# Altium PCB DS153-1.0-C氢气传感器.PcbDoc
Units mil, origin at the board's own origin, x right, y up, seen from the top; angles counter-clockwise.
Board outline 688.98 x 688.98 mil, 2 copper layers (Top Layer, Bottom Layer); 11 components, 7 nets, 31 pads, 11 vias.
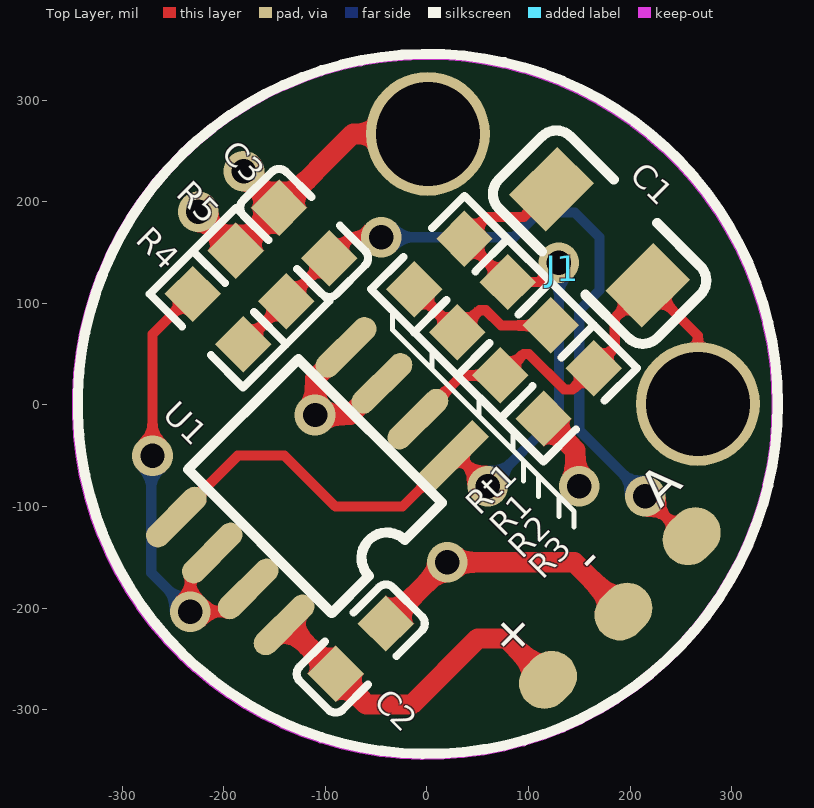
[diagram p0: Top Layer view]
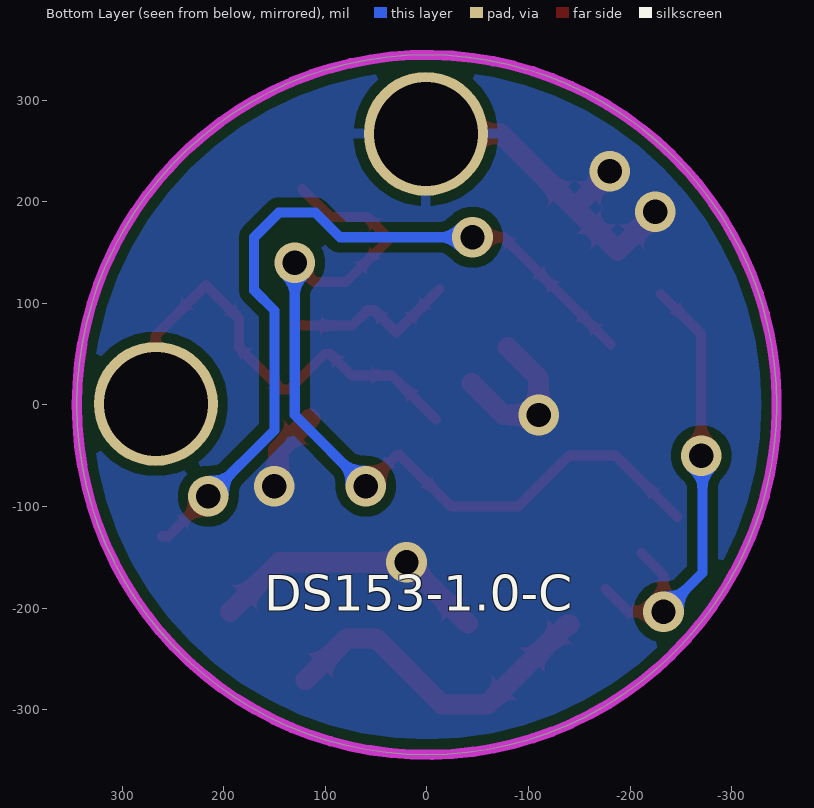
[diagram p1: Bottom Layer view, seen from below]
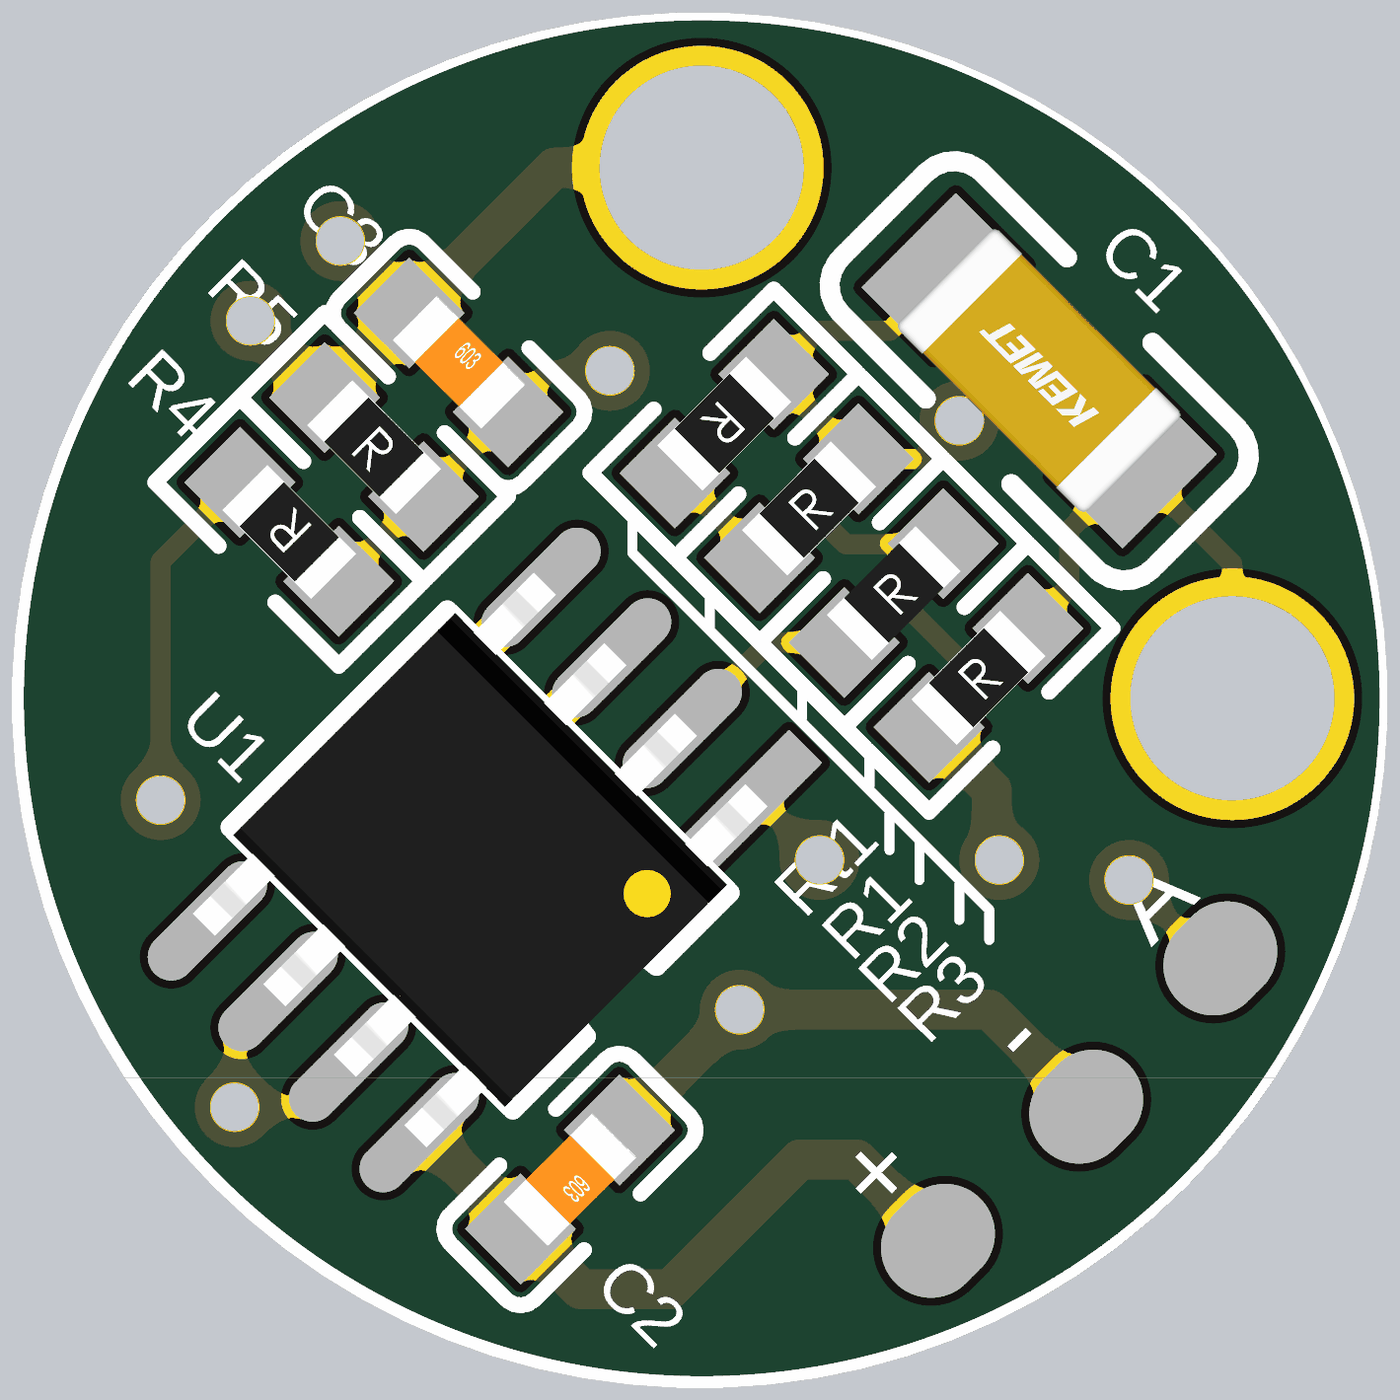
[diagram p2: 3D render of the assembled board from above, using the file's embedded part models]

## Layer stack, top to bottom
Top Solder: solder mask 0.4, Solder Resist, Dk 3.5
Top Layer: signal copper 1.4
Dielectric 1: dielectric 12.6, FR-4, Dk 4.8
Bottom Layer: signal copper 1.4
Bottom Solder: solder mask 0.4, Solder Resist, Dk 3.5

## Board outline
0,-344.49 cw(c0,0) -344.49,0 cw(c0,0) 0,344.49 cw(c0,0) 344.49,0 cw(c0,0)

## Design rules (kind name [scope] priority, off if disabled: settings)
Clearance [All] p1: gap=10 ignorepadtopadclearanceinfootprint=FALSE except(0: Arc-Hole Track-Hole SMDPad-Hole THPad-Hole Via-Hole Fill-Hole Poly-Hole Region-Hole Text-Hole)
PolygonConnect [All] p1: connectstyle=Relief reliefconductorwidth=10 reliefentries=4 polygonreliefangle="90 Angle" airgapwidth=10
RoutingVias [All] p1: holewidth=28 width=50 viastyle="Through Hole" minholewidth=28 minwidth=50 maxholewidth=28 maxwidth=50
SolderMaskExpansion [All] p1: expansion=4 istentingtop=FALSE
Width [All] p1: maxlimit=20 minlimit=10 preferedwidth=10
30 further rules are at their usual default settings.

## Components (designator, comment, footprint, x,y, rotation, side; value= is the part's Value field where it differs from the comment)
C1 "MLCC 22uF 50V ±20％ 1206" 1206CAP 170,165 r135 top value=22uF
C2 "SMDCAP00013" 0603CAP -65,-240 r225 top value=100nF
C3 "SMDCAP00013" 0603CAP -120.71,169.2 r315 top value=100nF
J1 "SL000000042" 2_Electrode 0,0 r0 top locked value=三电极传感器
R1 "SMDRES00071" 0603RES 54.75,96.11 r45 top value=100K
R2 "Chip 120K 1/16W ±1％ 0603" 0603RES 97.18,53.68 r45 top value=120K
R3 "SMDRES00034" 0603RES 139.6,11.26 r45 top value=1K
R4 "SMDRES00060" 0603RES -205.56,84.35 r135 top value=30K--0.1%
R5 "SMDRES00056" 0603RES -163.14,126.78 r315 top value=10K--0.1%
Rt1 "SE000000015" 0603RES 12.32,138.54 r225 top value=50K
U1 "OPA2192" SO-8 -110,-80 r225 top

## Footprints (in the part's own frame and the unit in brackets; to place one, negate y for a bottom-side part, rotate by r counter-clockwise, add the part's x,y. Pads: shape width x height; smd on the part's side, far side on the other; paste and mask are expansions set on the pad)
2_Electrode [mm]
  round 3.1 hole 2.6: 1(6.775,0.025) 3(0.025,6.775)
  silkscreen extent -8.72,-8.72 8.78,8.77
0603CAP [mm]
  rect 1x1 smd: 1(-0.889,0) 2(0.89,0)
  silkscreen extent -1.65,-0.76 1.65,0.76, body extent -0.8,-0.4 0.8,0.4, height 0.3
0603RES [mm]
  rect 1x1 smd: 1(-0.889,0) 2(0.889,0)
  silkscreen extent -1.65,-0.76 1.65,0.76, body extent -0.8,-0.41 0.8,0.41, height 0.51
1206CAP [mm]
  rect 1.3x1.7 smd: 1(-1.7,0) 2(1.7,0)
  silkscreen extent -2.8,-1.27 2.8,1.27, body extent -1.7,-0.9 1.7,0.9, height 1.8
SO-8 [mm]
  rect 1.9x0.6 smd: 1(-3,1.905)
  oval 1.9x0.6 smd: 2(-3,0.635) 3(-3,-0.635) 4(-3,-1.905) 5(3,-1.905) 6(3,-0.635) 7(3,0.635) 8(3,1.905)
  silkscreen extent -1.95,-2.54 1.95,2.54, body extent -3.07,-2.45 3.07,2.45, height 1.77

## Part data
C1: "贴片电容"
C2 C3: library part "MLCC 100nF 50V ±10％ 0603", "贴片电容"
J1: library part "DIP3 单排直针 间距2.54mm 针长11mm 铜", "单排直针"
R1: library part "Chip 100K 1/16W ±1％ 0603", "贴片电阻"
R2: "贴片电阻"
R3: library part "Chip 1K 1/16W ±1％ 0603", "贴片电阻"
R4: library part "Chip 30K 1/16W ±1％ 0603", "贴片电阻"
R5: library part "Chip 10K 1/16W ±1％ 0603", "贴片电阻"
Rt1: library part "NTC 10K 热敏电阻 5% Φ5 MF52A1 B值:3950K", "热敏电阻"
U1: library part TL062C

## Free pads (board coordinates)
  oval 60x50 smd rot 45: 1(119.29,-270.71) 2(193.54,-203.54) 3(260.71,-129.29)

## Via types
v1: diameter 40, hole 24, Top Layer to Bottom Layer, tented both sides, 11 vias

## Nets (pads, with @x,y where several pads share a name; then routed paths per layer and width w, separated by ;. In a path a pad name is that pad's centre, name@x,y a point inside that pad or via, vN(x,y) a via of type N, cw(c..) or ccw(c..) an arc to the next point about the centre after c; other vN are vias at no path point)
GND: C2.1 C3.1 J1.3 pad.2 R3.1 R5.1 U1.3 U1.4 | length 858.6
  Top Layer w20: v1(-225,190) -225,188.64 R5.1 C3.1 ; v1(-180,230) -180,228.49 C3.1 ; U1.4 -110,26.07 v1(-110,-10) -75.36,-10 U1.3 ; C2.1 v1(20,-155) 145,-155 pad.2 ; J1.3 -72.68,266.73 C3.1 ; R3.1 146.17,-44.81 146.17,-76.17 v1(150,-80)
NetC1_1: C1.1 J1.1 R2.1 R3.2 U1.2 | length 463.6
  Top Layer w10: U1.2 34.29,28.93 73.93,28.93 95,50 100.41,50 135.24,15.18 143.52,15.18 185,56.65 185,85.35 C1.1 266.73,68.27 J1.1
NetC1_2: C1.2 R1.2 Rt1.1 U1.1 U1.5 | length 859.2
  Top Layer w10: U1.5 -186.07,-50 -140,-50 -90,-100 -23.93,-100 U1.1 29.52,-49.52 v1(60,-80) ; C1.2 95.35,185 58.79,185 Rt1.1 R1.2 110.86,120.86 v1(130,140)
  Bottom Layer w10: v1(60,-80) 130,-10 v1(130,140)
NetR1_1: R1.1 R2.2 Rt1.2 | length 167.6
  Top Layer w10: Rt1.2 R1.1 51.79,93.15 58.15,93.15 73.28,78.02 121.92,78.02 R2.2
NetR4_2: R4.2 U1.6 U1.7 | length 479.2
  Top Layer w10: v1(-270,-50) -270,69.41 R4.2 ; U1.6 -232.91,-167.56 v1(-232.91,-203.8) -198.44,-203.8 U1.7
  Bottom Layer w10: v1(-270,-50) -271.3,-51.3 -271.3,-165.41 v1(-232.91,-203.8)
SIG: C3.2 pad.3 R4.1 R5.2 | length 771.7
  Top Layer w10: R4.1 R4.1 C3.2 -75.36,165 v1(-45,165) ; v1(215,-90) 254.29,-129.29 pad.3
  Bottom Layer w10: v1(-45,165) 85.52,165 109.65,189.13 145.87,189.13 170,165 170,112.78 150,92.78 150,-25 v1(215,-90) v1@215,-95
VCC_12V_BOOST: C2.2 pad.1 U1.8 | length 336.1
  Top Layer w20: U1.8 -138,-216.55 C2.2 -59.55,-295 -15,-295 50,-230 78.58,-230 pad.1

## Polygon pours and split planes (outlines as drawn)
GND on Bottom Layer "NONET_L02_P-001" (solid, remove dead copper, pour order 1): 1,345 cw(c1,1) 345,1 345,-1 cw(c1,-1) 1,-345 -1,-345 cw(c-1,-1) -345,-1 -345,1 cw(c-1,1) -1,345 0,345

## Keep-outs
Keep-Out Layer:
  circle w10: c0,0 r344.49
  circle w10: c0,0 r344.49

## Silkscreen, mask and mechanical layers (free items; w line width, h text height)
Top Overlay:
  lines w5: -33.64,92.57 -33.64,73.64 145,-105 145,-120 ; 5,35 5,55 ; 51.21,-8.79 51.21,7.72 ; 85,-42.87 85,-23.93 ; 95,-75 95,-55 ; 110,-90 110,-70 ; 130,-110 130,-90
  text "+     -     A" at 90,-260 h60 r45
Bottom Overlay:
  text "DS153-1.0-C" at 160,-214.28 h60
Mechanical 1:
  circle w10: c0,0 r344.49
  circle w10: c0,0 r344.49